# Altium PCB LM2596 moduel.PcbDoc
Units mm, origin at the board's own origin, x right, y up, seen from the top; angles counter-clockwise.
Board outline 59.3 x 27.05 mm, 2 copper layers (TopLayer, BottomLayer), stack 1.671 mm thick; 18 components, 8 nets, 46 pads, 29 vias.
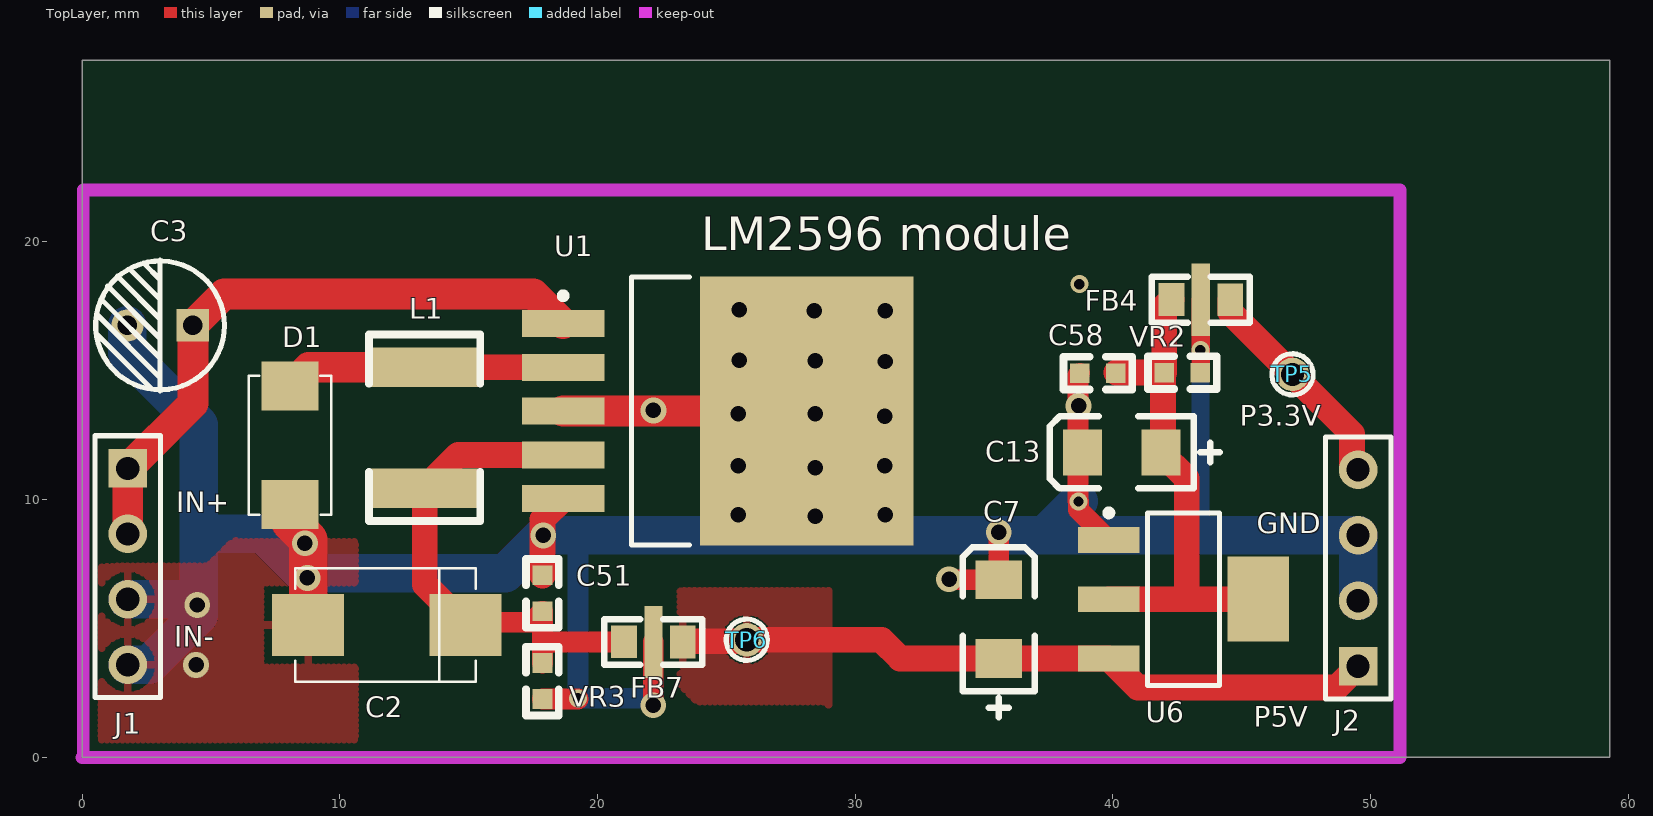
[diagram p0: TopLayer view]
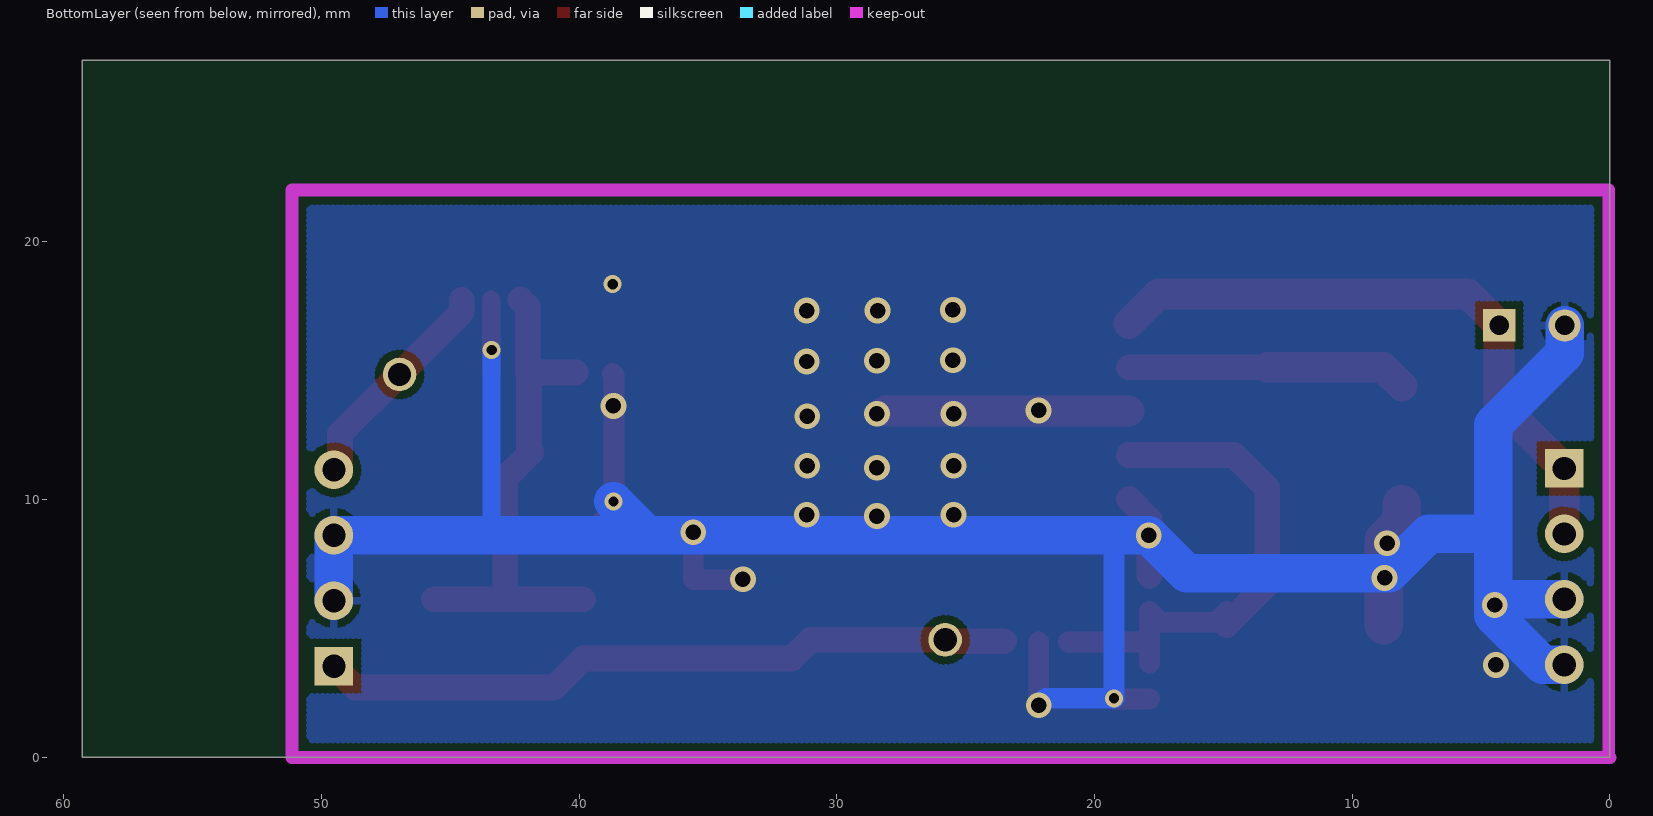
[diagram p1: BottomLayer view, seen from below]

## Layer stack, top to bottom
TopLayer: signal copper 0.0356
Dielectric: core 1.6, FR-4, Dk 4.8
BottomLayer: signal copper 0.0356

## Board outline
0,0 59.3,0 59.3,27.05 0,27.05

## Design rules (kind name [scope] priority, off if disabled: settings)
Clearance Clearance_poly [InPolygon] p1: gap=0.3
Clearance [All] p2: gap=0.15
ComponentClearance [All] p1: gap=0.15 collisioncheckmode=3 verticalgap=0.254 showdistances=FALSE
FabricationTestPointUsage TestPointUsage [All] p1: valid=0 allowmultiple=FALSE
FabricationTestpoint Testpoint [All] p1: side=3 testpointundercomponent=TRUE minsize=1.016 maxsize=2.54 preferedsize=1.524 minholesize=0.508 maxholesize=1.016 preferedholesize=0.813 testpointgrid=0.025 allowsidetop=TRUE allowsidebottom=TRUE usegrid=TRUE gridtolerance=0
HoleSize [All] p1: absolutevalues=TRUE maxlimit=8 minlimit=0.025 maxpercent=80.000 minpercent=20.000
MinimumSolderMaskSliver [All] p1: minsoldermaskwidth=0.15
PlaneClearance [All] p1: clearance=0.5
PlaneConnect [All] p1: planeconnectstyle=Relief reliefexpansion=0.5 reliefentries=4 reliefconductorwidth=0.3 reliefairgap=0.3
PolygonConnect PolygonConnect_via [IsVia] p1: connectstyle=Direct reliefconductorwidth=0.254 reliefentries=4 polygonreliefangle="90 Angle"
PolygonConnect [All] p2: connectstyle=Relief reliefconductorwidth=0.3 reliefentries=4 polygonreliefangle="90 Angle"
RoutingVias [All] p1: holewidth=0.305 width=0.61 viastyle="Through Hole" minholewidth=0.254 minwidth=0.508 maxholewidth=2 maxwidth=5
SilkToSilkClearance [All] p1: silktosilkclearance=0
SilkscreenOverComponentPads [All] p1: minsilkscreentomaskgap=0
SolderMaskExpansion [All] p1: expansion=0.102
Width [All] p1: maxlimit=5.08 minlimit=0.1 preferedwidth=0.254
19 further rules are at their usual default settings.

## Components (designator, comment, footprint, x,y, rotation, side; value= is the part's Value field where it differs from the comment)
C2 "100uF/16V" D 14.875,5.125 r180 top
C3 "100uF/50V" PCAP_100 4.3,16.75 r180 top
C7 "10uF" 1206C 35.575,3.825 r90 top
C13 "22uF" 1206C 41.875,11.819 r180 top
C51 "0.1uF" 0603A 17.87,5.65 r90 top
C58 "0.1uF" 0603 40.125,14.894 r180 top
D1 "SS34" ZD 8.075,9.8 r90 top
FB4 "NFM21PC105B1C3" NFM21PC105 42.275,17.744 r0 top
FB7 "NFM21PC105B1C3" NFM21PC105 21.027,4.465 r0 top
J1 "Header 2" HDR1X4 1.775,11.2 r270 top
J2 "Header 4" HDR1X4 49.525,3.525 r90 top
L1 "47uH/1.5A" 1812 13.3,15.125 r270 top
TP5 "P3.3V" "TEST POINT" 46.975,14.85 r270 top
TP6 "P5V" "TEST POINT" 25.8,4.55 r270 top
U1 "LM2596S-5.0" TS5B_N 24.675,13.425 r0 top
U6 "LM1117IMP-3.3" MP04A_N 42.75,6.125 r0 top
VR2 "V3.5MLA0603N" 0603 43.4,14.919 r180 top (schematic designator VA1)
VR3 "V5.5MLA0603N" 0603 17.87,2.25 r90 top (schematic designator VA2)

## Footprints (in the part's own frame and the unit in brackets; to place one, negate y for a bottom-side part, rotate by r counter-clockwise, add the part's x,y. Pads: shape width x height; smd on the part's side, far side on the other; paste and mask are expansions set on the pad)
0603 [mil]
  rect 30x30 smd: 1(0,0) 2(55,0)
  silkscreen extent -25,-25 80,25
0603A [mil]
  rect 30x30 smd: 1(0,0) 2(55,0)
  silkscreen extent -25,-25 80,25
1206C [mm]
  rect 1.5x1.8 smd: 1(0,0) 2(3.048,0)
  silkscreen extent -2.29,-1.4 4.32,1.4
1812 [mil]
  rect 60x164.37 smd: 1(0,0) 2(185,0)
  silkscreen extent -50,-85 235,85
D [mil]
  rect 110x94.49 smd: 1(0,0) 2(240,0)
  silkscreen extent -16,-87 260,87
HDR1X4 [mm] "Connector; Header; 4 Position"
  rect 1.5x1.5 hole 0.9: 1(0,0)
  round 1.5 hole 0.9: 2(2.54,0) 3(5.08,0) 4(7.62,0)
  silkscreen extent -1.27,-1.27 8.89,1.27
MP04A_N [mm] "SOT223, 4-Leads, Body 6.5x3.5mm, Pitch 2.3mm, Lead Span 7mm, IPC Medium Density"
  rect 2.4x1 smd: 1(-2.9,2.3) 2(-2.9,0) 3(-2.9,-2.3)
  rect 2.4x3.3 smd: 4(2.9,0)
  silkscreen extent -3.02,-3.35 1.4,3.47, body extent -1.85,-3.35 1.85,3.35, height 1.8
NFM21PC105 [mm]
  rect 1x1.27 smd: 1(0.01,0.008) 2(2.286,0)
  rect 0.7x2.8 smd: 3(1.143,0)
  silkscreen extent -0.76,-0.89 3.05,0.89
PCAP_100 [mm]
  rect 1.25x1.25 hole 0.75: 1(0.001,-0.009)
  round 1.25 hole 0.75: 2(2.54,0)
  silkscreen extent -1.23,-2.54 3.77,2.54
"TEST POINT" [mm]
  round 1.3 hole 0.9: 1(0,0)
  silkscreen extent -0.8,-0.8 0.8,0.8
TS5B_N [mm] "D2-PAK, 6-Leads, Body 8.6x10.2mm, Pitch 1.7mm, Lead Span 14.1mm, IPC Medium Density"
  rect 3.2x1.05 smd: 1(-6,3.4) 2(-6,1.7) 3(-6,0) 4(-6,-1.7) 5(-6,-3.4)
  rect 8.3x10.45 smd: 6(3.45,0)
  silkscreen extent -6.12,-5.2 -1.1,5.2, body extent -3.35,-5.2 6.05,5.2, height 4.65
ZD [mm]
  rect 1.9x2.2 smd: 1(0,0) 2(4.6,0)
  silkscreen extent -0.4,-1.6 5,1.6

## Part data
C2 C3: library part CAPE, "极?"
C7 C13: library part C, "极?"
C51 C58: library part CAP, "Capacitor"
D1: library part "D Schottky", "Schottky Diode"
FB4 FB7 L1: library part Inductor, "Inductor"
J1: "Header, 2-Pin"
J2: "Header, 4-Pin"
TP5 TP6: library part PAD
U1: "SIMPLE SWITCHER?Power Converter 150 KHz 3A Step-Down Voltage Regulator, 5-pin TO-263"
U6: "800mA Low-Dropout Linear Regulator, 4-pin SOT-223"
VR2 VR3: library part "D Zener", "Zener Diode"

## Via types
v1: diameter 1, hole 0.6, TopLayer to BottomLayer, 25 vias
v2: diameter 0.7, hole 0.4, TopLayer to BottomLayer, 4 vias

## Nets (pads, with @x,y where several pads share a name; then routed paths per layer and width w, separated by ;. In a path a pad name is that pad's centre, name@x,y a point inside that pad or via, vN(x,y) a via of type N, cw(c..) or ccw(c..) an arc to the next point about the centre after c; other vN are vias at no path point)
+24V: C3.1 J1.1 J1.2 U1.1 | length 24.5
  TopLayer w1.2: J1.2 J1.1 4.299,13.724 C3.1 5.516,17.975 17.525,17.975 U1.1
GND: C2.2 C3.2 C7.2 C13.2 C51.2 C58.2 D1.1 FB4.3 FB7.3 J1.3 J1.4 J2.2 J2.3 U1.3 U1.5 U1.6 U6.1 VR2.1 VR3.1 | length 121.7
  TopLayer w0.7: v2(43.4,15.794) 43.4,14.969 43.418,14.987 FB4.3 FB4.3@43.425,17.751
  TopLayer w0.8: VR3.1 v2@19.25,2.25 ; v1(22.17,2.005) FB7.3 ; v1@33.677,6.873 C7.2 v1(35.575,8.725) ; C58.2 38.652,14.818 38.652,9.942 v2(38.675,9.919) 38.675,9.6 U6.1
  TopLayer w1: C51.2 17.87,9.219 U1.5
  TopLayer w1.2: U1.3 U1.6
  TopLayer w1.5: D1.1 8.075,9.129 8.779,8.425 C2.2
  BottomLayer w0.7: 43.4,8.88 v2(43.4,15.794)
  BottomLayer w0.8: 19.25,8.475 v2(19.25,2.275) 21.9,2.275 v1(22.17,2.005)
  BottomLayer w1.5: C3.2 1.76,15.665 4.525,12.9 4.525,8.66 ; J1.4 2.605,3.58 v1@4.525,5.5 ; J1.3 3.905,6.12 v1@4.525,5.5 ; v2(38.675,9.919) 37.361,8.605 ; J2.2 J2.3 37.361,8.605 ; v1@4.525,5.5 4.525,8.66 ; 4.525,8.66 7.04,8.66 8.575,7.125 16.425,7.125 v1(17.9,8.6) 35.575,8.6 35.58,8.605 37.361,8.605
  other v1: 4.425,3.575 4.475,5.9 33.65,6.9 8.75,6.95 8.65,8.3 28.45,9.35 25.475,9.4 31.175,9.4 28.45,11.225 25.475,11.3 31.15,11.3 31.15,13.225 25.475,13.325 28.45,13.325 22.175,13.45 38.675,13.625 31.175,15.35 28.45,15.375 25.5,15.4 28.425,17.325 31.175,17.325 25.5,17.35
  other v2: 38.706,18.35
NetC2_1: C2.1 C51.1 FB7.1 L1.2 U1.4 VR3.2 | length 20.4
  TopLayer w0.8: C2.1@14.875,5.65 15.3,5.225 17.445,5.225 C51.1 17.87,4.575 ; VR3.2 17.87,4.575 ; FB7.1@21.027,4.465 17.979,4.465 17.87,4.575
  TopLayer w1: C2.1 13.3,6.7 L1.2 14.599,11.725 U1.4
NetC13_1: C13.1 C58.1 FB4.1 U6.2 U6.4 VR2.2 | length 19.7
  TopLayer w1: U6.2 U6.4 ; C58.1@40.15,14.919 41.953,14.919 41.953,11.897 C13.1 42.875,10.819 42.875,6.25 ; VR2.2 42.003,17.47 FB4.1
NetD1_2: D1.2 L1.1 U1.2 | length 10.9
  TopLayer w1: L1.1 U1.2
  TopLayer w1.2: D1.2 8.8,15.125 L1.1
NetJ1_1: 
V330_D: FB4.2 J2.4 TP5.1 | length 8.7
  TopLayer w1: FB4.2 44.561,17.264 TP5.1 49.285,12.54 49.285,11.385 J2.4
V500_A: C7.1 FB7.2 J2.1 TP6.1 U6.3 | length 27.2
  TopLayer w1: FB7.2@23.519,4.489 TP6.1@25.936,4.489 ; TP6.1 31.025,4.55 31.75,3.825 C7.1 U6.3 40.975,2.7 48.7,2.7 J2.1

## Polygon pours and split planes (outlines as drawn)
GND on TopLayer "BottomLayer-No Net" (hatched 90Degree grid 0.2 track 0.3, remove dead copper, pour order 6): 1.35,7.4 4.9,7.4 5.925,8.425 6,8.35 10.6,8.35 10.6,0.6 10.55,0.55 0.575,0.55 0.55,0.525 0.575,0.55 0.575,7.35
V500_A on TopLayer "Top Layer-No Net" (hatched 90Degree grid 0.2 track 0.3, remove dead copper, pour order 15): 23.225,6.5 23.275,6.45 28.975,6.45 28.975,2.2 28.925,2.15 23.875,2.15 23.225,2.8
GND on BottomLayer "BottomLayer-No Net" (hatched 90Degree grid 0.2 track 0.3, remove dead copper, pour order 4): 0.275,21.45 50.625,21.45 50.625,0.725 50.525,0.625 0.625,0.625 0.375,0.875

## Keep-outs
KeepOutLayer:
  lines w0.5: 0,-0.025 51.15,-0.025 51.15,22 0.05,22 0.05,0.025

## Silkscreen, mask and mechanical layers (free items; w line width, h text height)
TopOverlay:
  text "LM2596 module" at 24.025,19.675 h1.3
  text "IN+" at 3.65,9.5 h0.8
  text "GND" at 45.6,8.675 h0.8
  text "IN-" at 3.575,4.275 h0.8
Mechanical1:
  lines w0.3: -2.806,0 72.45,0 ; 1.775,11.2 57.1,11.2

## Dimensions
0.65,0 to 1.675,22 on Mechanical1
51.15,1.325 to 0.175,1.725 on Mechanical1